# Altium PCB Lab10.PcbDoc
Units mil, origin at the board's own origin, x right, y up, seen from the top; angles counter-clockwise.
Board outline 5000 x 3858.27 mil, 2 copper layers (Top Layer, Top, Bottom Layer, Bottom); 35 components, 24 nets, 85 pads, 0 vias.
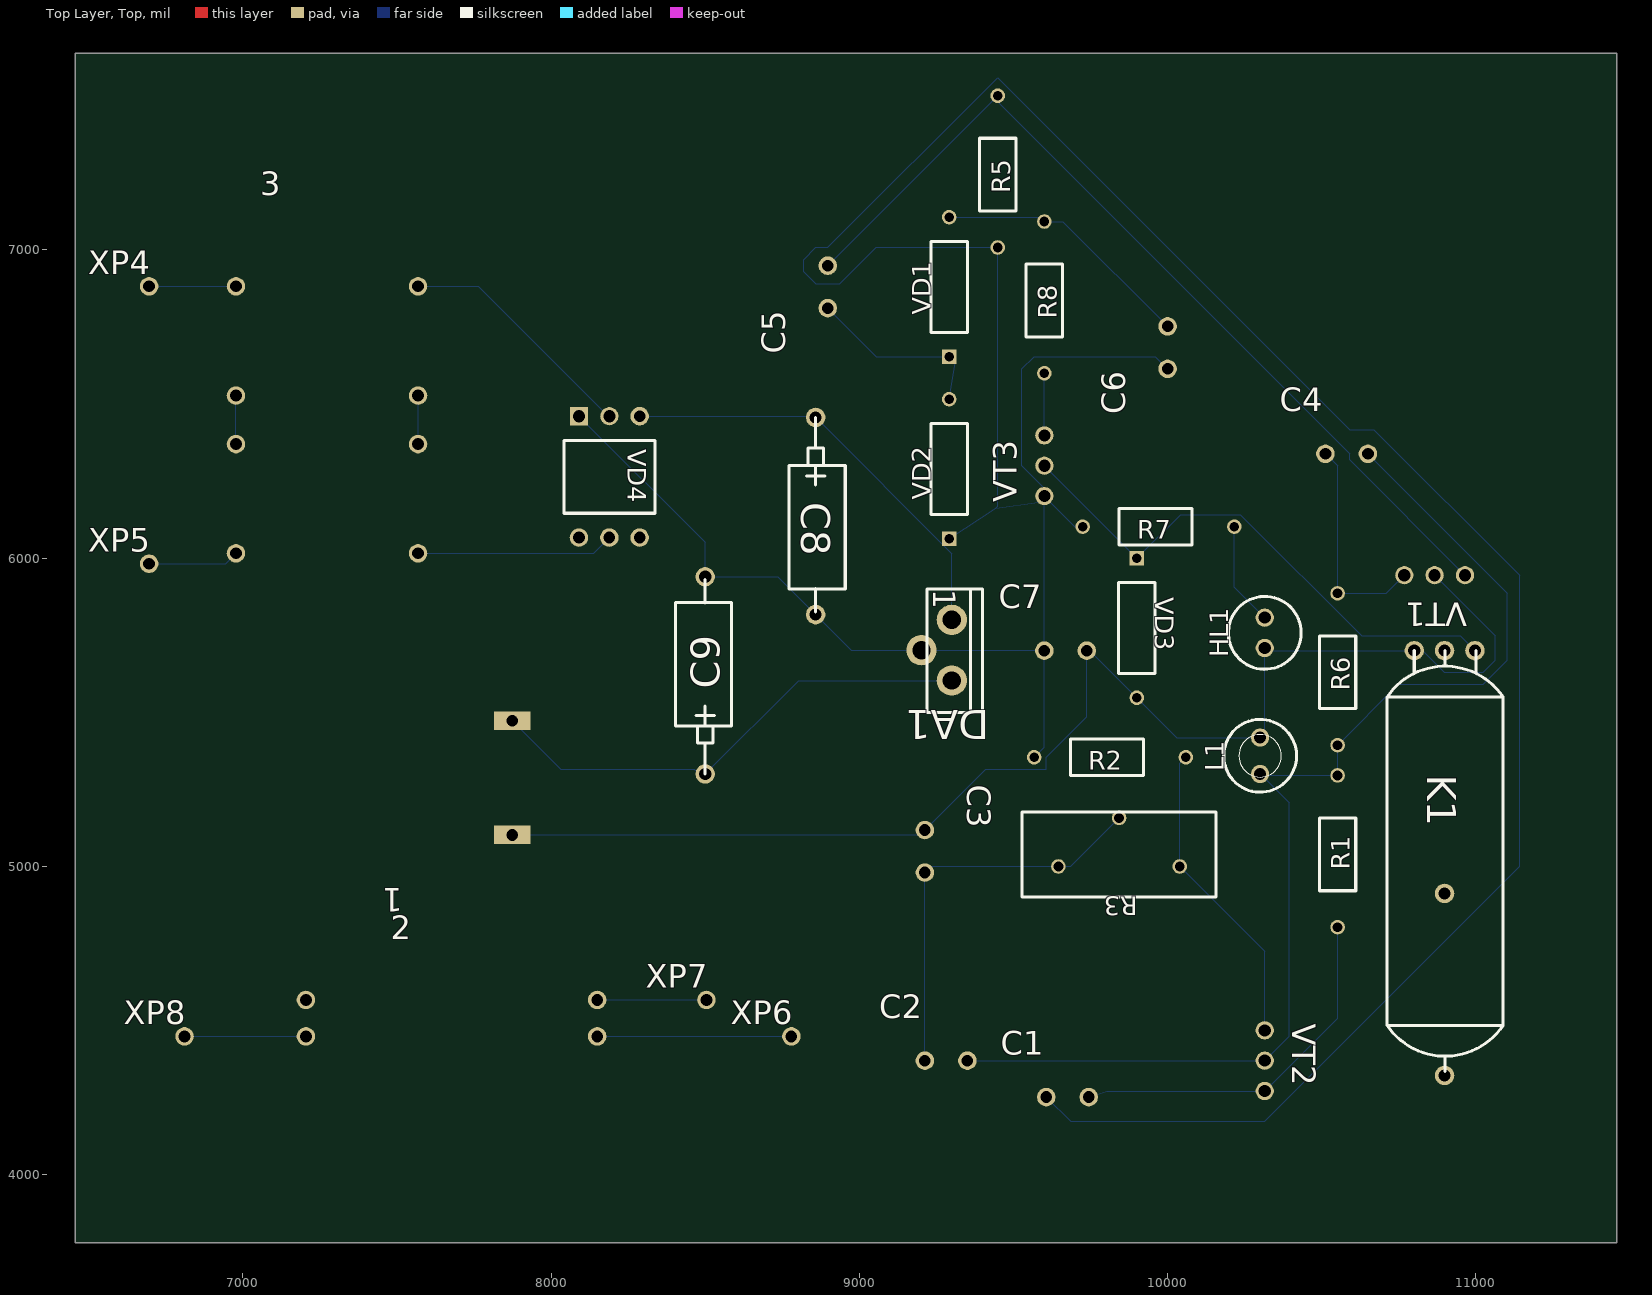
[diagram p0: Top Layer, Top view]
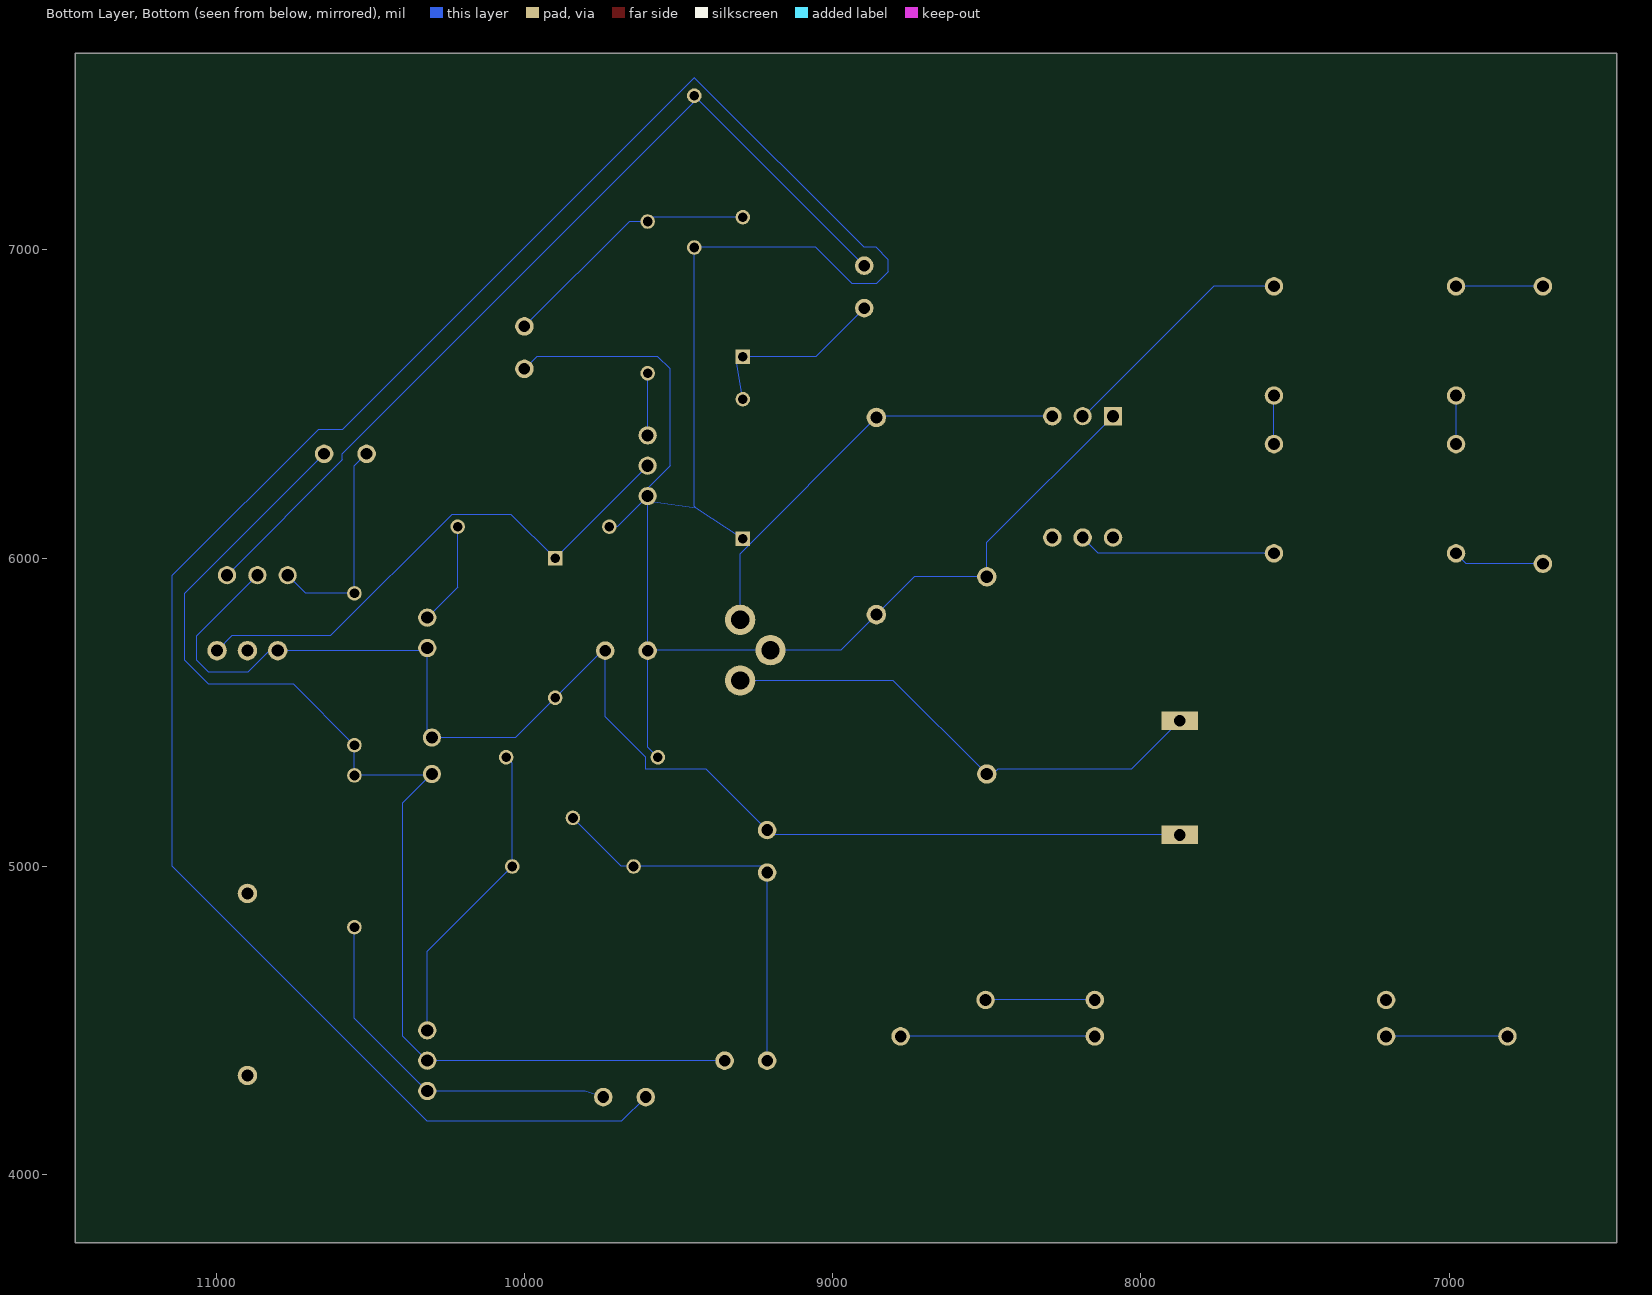
[diagram p1: Bottom Layer, Bottom view, seen from below]

## Layer stack, top to bottom
Top Solder, Top Mask: solder mask 0.4, Solder Resist, Dk 3.5
Top Layer, Top: signal copper 1.4
Dielectric 1: dielectric 12.6, FR-4, Dk 4.8
Bottom Layer, Bottom: signal copper 1.4
Bottom Solder, Bot Mask: solder mask 0.4, Solder Resist, Dk 3.5

## Board outline
6456.69,3779.53 11456.69,3779.53 11456.69,7637.8 6456.69,7637.8

## Design rules (kind name [scope] priority, off if disabled: settings)
Clearance [All] p1: gap=10 ignorepadtopadclearanceinfootprint=FALSE except(0: Arc-Hole Track-Hole SMDPad-Hole THPad-Hole Via-Hole Fill-Hole Poly-Hole Region-Hole Text-Hole; 11.81: Arc-Arc Arc-Track Arc-THPad Arc-Via Track-Track Track-THPad Track-Via THPad-THPad THPad-Via Via-Via)
PlaneClearance [All] p1: clearance=10
PolygonConnect [All] p1: connectstyle=Relief reliefconductorwidth=10 reliefentries=4 polygonreliefangle="90 Angle" airgapwidth=10
RoomDefinition [All] p1: confinementstyle=ConfineIn formatcopy=TRUE lockcomponents=FALSE outline 6456.69,3779.53 11456.69,3779.53 11456.69,7637.8 6456.69,7637.8
RoutingVias [All] p1: holewidth=28 width=50 viastyle="Through Hole" minholewidth=28 minwidth=50 maxholewidth=28 maxwidth=50
SolderMaskExpansion [All] p1: expansion=4 istentingtop=FALSE
Width [All] p1: maxlimit=10 minlimit=10 preferedwidth=10
29 further rules are at their usual default settings.

## Components (designator, comment, footprint, x,y, rotation, side; value= is the part's Value field where it differs from the comment)
1 "" T1 7874.02,5472.44 r180 top
2 "" K1.1_K1.1(Primary) 7204.72,4448.82 r0 top
3 "220V" "ТПП 277-127/220-50_ТПП 277-127/220-50(Primary)" 6977.95,6881.89 r0 top
C1 "0,22mk" "KM6A - M47" 9606.3,4251.97 r0 top
C2 "0.1mk" "KM6A - M47" 9212.6,4370.08 r0 top
C3 "0.22mk" "KM6A - M47" 9212.6,5118.11 r270 top
C4 "1000" "KM6A - M47" 10511.81,6338.58 r0 top
C5 "0.1mk" "KM6A - M47" 8897.64,6811.02 r90 top
C6 "0,1mk" "KM6A - M47" 10000,6614.17 r90 top
C7 "0.22mk" "KM6A - M47" 9600,5700 r0 top
C8 "25V" K534A-1 8858.27,6456.69 r270 top
C9 "25V" K534A-1 8500,5300 r90 top
DA1 "" KR142EN 9300,5800 r180 top
HL1 "{Value}" АЛ307 10314.96,5708.66 r90 top
K1 "" RES64 10800,5700 r270 top
L1 "{Value}" "L (3,5)" 10300,5300 r90 top
R1 "220k" МЛТ(0.125) 10551.18,4803.15 r90 top
R2 "4.7k" МЛТ(0.125) 9566.93,5354.33 r0 top
R3 "3,7k" СП3-38В 10039.37,5000 r180 top
R5 "10k" МЛТ(0.125) 9448.82,7007.87 r90 top
R6 "1.8k" МЛТ(0.125) 10551.18,5393.7 r90 top
R7 "560" МЛТ(0.125) 9724.41,6102.36 r0 top
R8 "1,8k" МЛТ(0.125) 9600,6600 r90 top
VD1 "{Value}" КД522 9291.34,6653.54 r90 top
VD2 "{Value}" КД522 9291.34,6062.99 r90 top
VD3 "{Value}" КД522 9900,6000 r270 top
VD4 "{Value}" КЦ407 8090.55,6460.63 r270 top
VT1 "" KT-13 10866.14,5944.88 r90 top
VT2 "" KT-13 10314.96,4370.08 r180 top
VT3 "" KT-13 9600,6300 r0 top
XP4 "{Value}" PAD 6696.06,6881.89 r0 top
XP5 "{Value}" PAD 6696.06,5981.89 r0 top
XP6 "{Value}" PAD 8779.53,4448.82 r0 top
XP7 "{Value}" PAD 8503.94,4566.93 r0 top
XP8 "{Value}" PAD 6811.02,4448.82 r0 top

## Footprints (in the part's own frame and the unit in brackets; to place one, negate y for a bottom-side part, rotate by r counter-clockwise, add the part's x,y. Pads: shape width x height; smd on the part's side, far side on the other; paste and mask are expansions set on the pad)
K1.1_K1.1(Primary) [mil]
  round 60 hole 38: 3(944.88,118.11) 4(0,0) 4(0,118.11) 5(944.88,0)
K534A-1 [mm]
  round 1.6 hole 1: 1(0,0) 2(16.25,0)
  silkscreen extent 0,-2.18 16.02,2.44
"KM6A - M47" [mil]
  round 60 hole 38: 1(0,0) 2(137.8,0)
KR142EN [mm]
  round 2.5 hole 1.5: 1(0,0) 2(2.5,2.5) 3(0,5)
  silkscreen extent -2.54,-2.54 2.03,7.62
KT-13 [mm]
  round 1.5 hole 1: 1(0,-2.5) 2(0,0) 3(0,2.5)
"L (3,5)" [mm]
  round 1.5 hole 1: 1(0,0) 2(3,0)
  silkscreen extent -1.5,-3 4.5,3
PAD [mil]
  round 60 hole 38: 1(0,0)
RES64 [mm]
  round 1.6 hole 1: 1(0,0) 2(0,5) 3(0,2.5) 4(35,2.5) 5(20,2.5)
  silkscreen extent 0,-2.24 34.69,7.32
T1 [mil]
  rect 118.11x60 hole 38: 1(0,0) 2(0,370.08)
АЛ307 [mm]
  round 1.5 hole 1: 1(0,0) 2(2.5,0)
  silkscreen extent -1.75,-3 4.25,3
КД522 [mm]
  rect 1.2x1.2 hole 0.8: 1(0,0)
  round 1.2 hole 0.8: 2(11.5,0)
  silkscreen extent 2,-1.5 9.5,1.5
КЦ407 [mm]
  rect 1.5x1.5 hole 1: 1(0,0)
  round 1.5 hole 1: 2(0,2.5)
  round 1.524 hole 0.965: 3(0,5) 4(10,5) 5(10,2.5) 6(10,0)
  silkscreen extent 2,-1.25 8,6.25
МЛТ(0.125) [mm]
  round 1.2 hole 0.8: 1(0,0) 2(12.5,0)
  silkscreen extent 3,-1.5 9,1.5
СП3-38В [mm]
  round 1.2 hole 0.8: 1(0,0) 2(10,0) 3(5,-4)
  silkscreen extent -3,-4.5 13,2.5
"ТПП 277-127/220-50_ТПП 277-127/220-50(Primary)" [mil]
  round 60 hole 38: 2(0,0) 3(0,-354.33) 7(0,-511.81) 9(0,-866.14) 11(590.55,0) 12(590.55,-354.33) 13(590.55,-511.81) 14(590.55,-866.14)

## Nets (pads, with @x,y where several pads share a name; then routed paths per layer and width w, separated by ;. In a path a pad name is that pad's centre, name@x,y a point inside that pad or via, vN(x,y) a via of type N, cw(c..) or ccw(c..) an arc to the next point about the centre after c; other vN are vias at no path point)
GND: C1.1 C6.1 C7.1 C8.2 C9.2 DA1.2 R2.1 R5.1 R7.1 VD2.1 VD4.1 VT3.1 | length 11885.9
  Bottom Layer, Bottom w3.94: VD4.1 8500,6051.18 C9.2 8735.43,5939.76 C8.2 8973.62,5701.57 DA1.2 9598.43,5701.57 C7.1 ; VD2.1 9442.88,6162.43 ; R2.1 9600,5387.4 C7.1 ; C1.1 9685.04,4173.23 10314.96,4173.23 11141.73,5000 11141.73,5944.88 10669.29,6417.32 10590.55,6417.32 9448.82,7559.06 8897.64,7007.87 8858.27,7007.87 8818.9,6968.5 8818.9,6929.13 8858.27,6889.76 8937.01,6889.76 9055.12,7007.87 R5.1 9448.82,6168.38 9442.88,6162.43 ; R7.1 9699.21,6102.36 VT3.1 ; C6.1 9960.63,6653.54 9566.93,6653.54 9527.56,6614.17 9527.56,6299.21 9600,6226.77 VT3.1 ; 9442.88,6162.43 9579.53,6181.1 VT3.1 ; C7.1 VT3.1
NET00000: C4.1 R6.2 VT1.3 | length 710.1
  Bottom Layer, Bottom w3.94: C4.1 10551.18,6299.21 R6.2 10708.66,5885.83 VT1.3
NET00003: C1.2 R1.1 VT2.3 | length 1203.4
  Bottom Layer, Bottom w3.94: C1.2 9803.15,4271.65 VT2.3 10551.18,4507.87 R1.1
NET00004: C2.1 C3.2 R3.2 R3.3 | length 1313.5
  Bottom Layer, Bottom w3.94: C2.1 C3.2 9232.28,5000 R3.2 9685.04,5000 R3.3
NET00005: R2.2 R3.1 VT2.1 | length 1008.1
  Bottom Layer, Bottom w3.94: R2.2 10039.37,5334.65 R3.1 10314.96,4724.41 VT2.1
NET00006: C5.2 R5.2 VT1.1 | length 2962.4
  Bottom Layer, Bottom w3.94: C5.2 R5.2 9448.82,7480.31 10590.55,6338.58 10590.55,6318.9 VT1.1
NET00007: C5.1 VD1.1 VD2.2 | length 606.5
  Bottom Layer, Bottom w3.94: C5.1 9055.12,6653.54 VD1.1 9311.02,6633.86 VD2.2
NET00008: 1.1 C9.1 DA1.3 | length 1623
  Bottom Layer, Bottom w3.94: 1.1 8031.5,5314.96 8464.57,5314.96 8479.53,5300 C9.1 8803.15,5603.15 DA1.3
NET00009: C6.2 R8.2 VD1.2 | length 855.4
  Bottom Layer, Bottom w3.94: VD1.2 9585.83,7106.3 R8.2 9659.84,7092.13 C6.2
NET00010: R8.1 VT3.3 | length 201.6
  Bottom Layer, Bottom w3.94: VT3.3 R8.1
NET00011: K1.2 VD3.1 VT3.2 | length 1762.8
  Bottom Layer, Bottom w3.94: VT3.2 VD3.1 10041.73,6141.73 10236.22,6141.73 10629.92,5748.03 10948.82,5748.03 K1.2
NET00012: 3.3 3.7 | length 157.5
  Bottom Layer, Bottom w3.94: 3.7 3.3
NET00013: 1.2 C3.1 C7.2 HL1.1 K1.1 L1.2 VD3.2 VT1.2 | length 4389.6
  Bottom Layer, Bottom w3.94: 1.2 9196.85,5102.36 C3.1 9409.45,5314.96 9606.3,5314.96 9606.3,5354.33 9737.8,5485.83 C7.2 9747.24,5700 VD3.2 10029.13,5418.11 L1.2 10314.96,5433.07 HL1.1 10323.62,5700 K1.1 10826.77,5700 10896.85,5629.92 11023.62,5629.92 11062.99,5669.29 11062.99,5748.03 VT1.2
NET00014: HL1.2 R7.2 | length 336
  Bottom Layer, Bottom w3.94: R7.2 10216.54,5905.51 HL1.2
NET00015: C2.2 C4.2 L1.1 R1.2 R6.1 VT2.2 | length 3839.6
  Bottom Layer, Bottom w3.94: C2.2 VT2.2 10393.7,4448.82 10393.7,5206.3 L1.1 10304.72,5295.28 R1.2 R6.1 10748.03,5590.55 11023.62,5590.55 11102.36,5669.29 11102.36,5885.83 C4.2
NET00016: C8.1 DA1.1 VD4.3 | length 1412.2
  Bottom Layer, Bottom w3.94: VD4.3 8854.33,6460.63 C8.1 9300,6014.96 DA1.1
NET00017: 3.12 3.13 | length 157.5
  Bottom Layer, Bottom w3.94: 3.13 3.12
NET00018: 3.11 VD4.2 | length 795
  Bottom Layer, Bottom w3.94: 3.11 7763.78,6881.89 8185.04,6460.63 VD4.2
NET00019: 3.14 VD4.5 | length 641.7
  Bottom Layer, Bottom w3.94: 3.14 8137.8,6015.75 VD4.5
NET00020: 2.3 XP7.1 | length 354.3
  Bottom Layer, Bottom w3.94: 2.3 XP7.1
NET00021: 3.2 XP4.1 | length 281.9
  Bottom Layer, Bottom w3.94: XP4.1 3.2
NET00022: 3.9 XP5.1 | length 295.9
  Bottom Layer, Bottom w3.94: XP5.1 6944.09,5981.89 3.9
NET00023: 2.4@7204.72,4448.82 XP8.1 | length 393.7
  Bottom Layer, Bottom w3.94: XP8.1 2.4@7204.72,4448.82
VCC_+5V: 2.5 XP6.1 | length 629.9
  Bottom Layer, Bottom w3.94: 2.5 XP6.1
pads on no net: 2.4@7204.72,4566.93 K1.3 K1.4 K1.5 VD4.4 VD4.6

## Text inside footprints (layer, text, board x,y; h text height)
DA1: Top Overlay, Top Silk "1" at 9215.78,5900 h125 r270